# Altium PCB Trap_PCB_V3.3.pcbdoc
Units mm, origin at the board's own origin, x right, y up, seen from the top; angles counter-clockwise.
Board outline 115.04 x 40 mm, 2 copper layers (Top Layer, Bottom Layer); 64 components, 34 nets, 173 pads, 4 vias.
Unrouted connection lines stored in the file: 1.
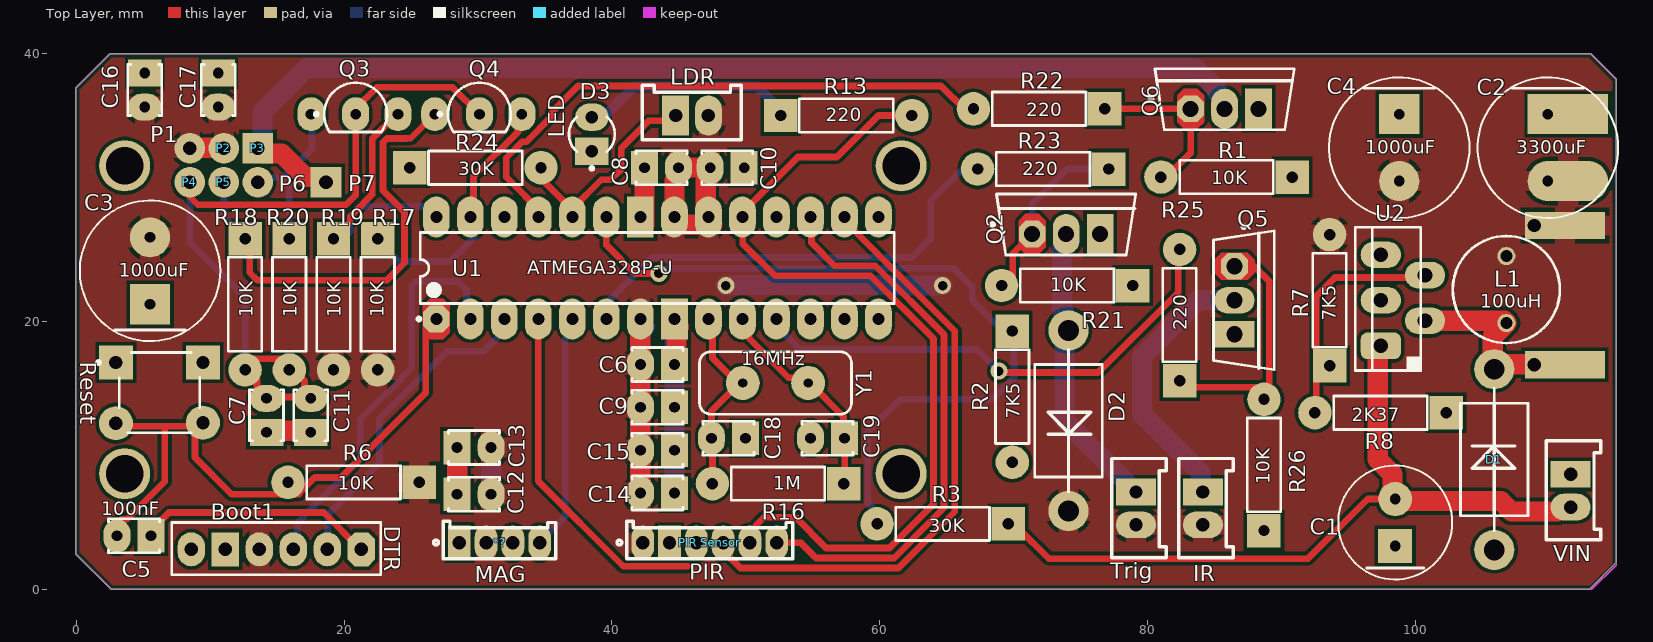
[diagram p0: Top Layer view]
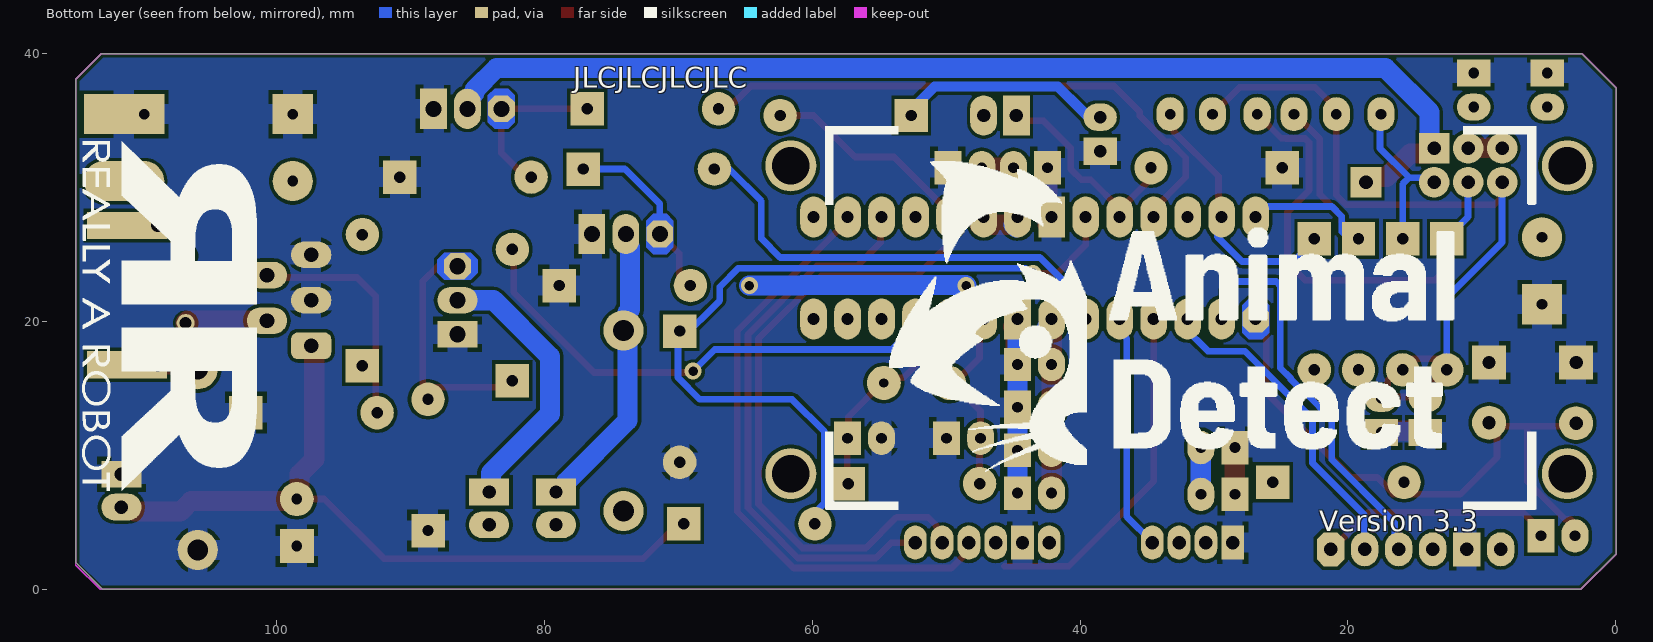
[diagram p1: Bottom Layer view, seen from below]

## Layer stack, top to bottom
Top Solder: solder mask 0.0102, Solder Resist, Dk 3.5
Top Layer: signal copper 0.0356
Dielectric1: dielectric 0.32, FR-4, Dk 4.8
Bottom Layer: signal copper 0.0356
Bottom Solder: solder mask 0.0102, Solder Resist, Dk 3.5

## Board outline
-0.04,2.64 -0.04,37.46 2.5,40 113.1,40 115,38.1 115,2 113,0 2.6,0

## Design rules (kind name [scope] priority, off if disabled: settings)
Clearance [All] p1: gap=0.25 ignorepadtopadclearanceinfootprint=TRUE
DiffPairsRouting [All] p1: maxlimit=2.54 minlimit=0.127 mostfreqgap=0.254 toplayer_minwidth=0.508 toplayer_maxwidth=2.54 toplayer_prefwidth=0.508 bottomlayer_minwidth=0.508 bottomlayer_maxwidth=2.54 bottomlayer_prefwidth=0.508 maxuncoupledlength=12.7
HoleSize [All] p1: absolutevalues=TRUE maxlimit=4 minlimit=0.3 maxpercent=80.000 minpercent=20.000
MinimumSolderMaskSliver [All] p1: minsoldermaskwidth=0.075
PlaneConnect [All] p1: planeconnectstyle=Relief reliefexpansion=0.254 reliefentries=4 reliefconductorwidth=1.524 reliefairgap=0.508
PolygonConnect [All] p1: connectstyle=Relief reliefconductorwidth=1.524 reliefentries=4 polygonreliefangle="90 Angle" airgapwidth=0.3
RoutingVias [All] p1: holewidth=0.711 width=1.27 viastyle="Through Hole" minholewidth=0.711 minwidth=1.27 maxholewidth=0.711 maxwidth=1.27
SilkToSilkClearance [All] p1: silktosilkclearance=0.1
SilkToSolderMaskClearance [IsPad] p1: minsilkscreentomaskgap=0.1 clearancetoexposedcopper=TRUE
SolderMaskExpansion [All] p1: expansion=0.1 istentingtop=FALSE
Width Width_PWR [All] p1: maxlimit=5 minlimit=0.3 preferedwidth=0.5
24 further rules are at their usual default settings.

## Components (designator, comment, footprint, x,y, rotation, side; value= is the part's Value field where it differs from the comment)
*? "MAG Sensor" MAG 34.6,3.5 r270 top
Boot1 "SWR25X-NRTC-S06-ST-BA" FP-SWR25X-NRTC-S06-ST-BA-MFG 14.93,3.3 r180 top
C1 "100uF" FP-EEU-FR1H101B-MFG 98.5,5 r90 top
C2 "1000uF" FP-RAD-TH-D_10_0_5-L_12_5-MFG#1 109.9,33 r270 top
C3 "1000uF" FP-RAD-TH-D_10_0_5-L_12_5-MFG#2 5.5,23.8 r90 top
C4 "1000uF" FP-RAD-TH-D_10_0_5-L_12_5-MFG#2 98.8,33 r270 top
C5 "100nF" KEMT-C315-THT-2#1 4.3,4 r0 top
C6 "100nF" KEMT-C315-THT-2#2 43.4,16.8 r180 top
C7 "100nF" KEMT-C315-THT-2#1 14.2,13 r270 top
C8 "100nF" KEMT-C315-THT-2#2 43.7,31.5 r0 top
C9 "10uF" KEMT-C315-THT-2#2 43.4,13.6 r180 top
C10 "10uF" KEMT-C315-THT-2#2 48.6,31.5 r180 top
C11 "10uF" KEMT-C315-THT-2#1 17.5,13 r270 top
C12 "10uF" KEMT-C315-THT-2#2 29.7,7.1 r0 top
C13 "100nF" KEMT-C315-THT-2#2 29.7,10.6 r0 top
C14 "100nF" KEMT-C315-THT-2#2 43.4,7.2 r180 top
C15 "10uF" KEMT-C315-THT-2#2 43.4,10.4 r180 top
C16 "100nF" KEMT-C315-THT-2#1 5.1,37.3 r90 top
C17 "10uF" KEMT-C315-THT-2#1 10.6,37.3 r90 top
C18 "22pF" KEMT-C315-THT-2#2 48.7,11.3 r180 top
C19 "22pF" KEMT-C315-THT-2#2 56.1,11.3 r180 top
D1 "1N5406" ONSC-AXIAL_LEAD-2-267-05_V 105.9,9.7 r270 top
D2 "1N5406" ONSC-AXIAL_LEAD-2-267-05_V 74.1,12.6 r90 top
D3 "LED" FP-HLMP-1719-MFG 38.5,34 r90 top
IR "JST HXP2" JST_XHP2_THROUGHHOLE 86.137,2.377 r90 top
L1 "100uH" WE-TI-LB 106.8,22.399 r90 top
LDR "JST HXP2" JST_XHP2_THROUGHHOLE 49.65,37.4 r180 top
P1 "0914-0-15-20-77-14-11-0" 0914-0-15-20-77-14-11-0#1 8.475,32.956 r0 top
P2 "0914-0-15-20-77-14-11-0" 0914-0-15-20-77-14-11-0#1 11.015,32.956 r0 top
P3 "0914-0-15-20-77-14-11-0" 0914-0-15-20-77-14-11-0#2 13.555,32.956 r0 top
P4 "0914-0-15-20-77-14-11-0" 0914-0-15-20-77-14-11-0#1 8.475,30.416 r0 top
P5 "0914-0-15-20-77-14-11-0" 0914-0-15-20-77-14-11-0#1 11.015,30.416 r0 top
P6 "0914-0-15-20-77-14-11-0" 0914-0-15-20-77-14-11-0#1 13.555,30.416 r0 top
P7 "0914-0-15-20-77-14-11-0" 0914-0-15-20-77-14-11-0#2 18.644,30.416 r0 top
"PIR Sensor" "JST - PH-6p - 2.0mm" PIR 48.3,3.5 r270 top
Q2 "IRLZ44NPbF" FP-PG-TO220-3-MFG 73.923,27.255 r90 top
Q3 "2N7000" ONSC-TO-92-3-29-11 20.854,35.5 r0 top
Q4 "2N7000" ONSC-TO-92-3-29-11 30.1,35.5 r0 top
Q5 "IRLZ44NPbF" FP-PG-TO220-3-MFG 87.2,21.6 r0 top
Q6 "IRLZ44NPbF" FP-PG-TO220-3-MFG 85.76,36.605 r90 top
R1 "10K" OMTE-RES7X2.5-2 85.9,30.8 r180 top
R2 "7K5" OMTE-RES7X2.5-2 69.9,14.4 r270 top
R3 "30K" OMTE-RES7X2.5-2 64.7,4.9 r180 top
R6 "10K" OMTE-RES7X2.5-2 20.7,8 r180 top
R7 "7K5" OMTE-RES7X2.5-2 93.6,21.6 r90 top
R8 "2K37" OMTE-RES7X2.5-2 97.4,13.2 r180 top
R13 "220" OMTE-RES7X2.5-2 57.5,35.4 r0 top
R16 "1M" OMTE-RES7X2.5-2 52.4,7.9 r180 top
R17 "10K" OMTE-RES7X2.5-2 22.5,21.3 r270 top
R18 "10K" OMTE-RES7X2.5-2 12.6,21.3 r270 top
R19 "10K" OMTE-RES7X2.5-2 19.2,21.3 r270 top
R20 "10K" OMTE-RES7X2.5-2 15.9,21.3 r270 top
R21 "10K" OMTE-RES7X2.5-2 74,22.7 r180 top
R22 "220" OMTE-RES7X2.5-2 71.9,35.9 r180 top
R23 "220" OMTE-RES7X2.5-2 72.209,31.4 r180 top
R24 "30K" OMTE-RES7X2.5-2 29.8,31.5 r0 top
R25 "220" OMTE-RES7X2.5-2 82.4,20.5 r90 top
R26 "10K" OMTE-RES7X2.5-2 88.7,9.3 r90 top
Reset "B3F-1000" OMRON-B3F-1000-4_V 6.2,14.7 r0 top
Trig "JST HXP2" JST_XHP2_THROUGHHOLE 81.137,2.377 r90 top
U1 "ATmega328-PU" 28P3 43.39,24.01 r90 top
U2 "LM2576T-ADJ" KC0005A 98.315,21.694 r180 top
VIN "JST HXP2" JST_XHP2_THROUGHHOLE 113.6,3.7 r90 top
Y1 "16MHz crystal" FOX-FOXSLF160-20 52.213,15.421 r0 top

## Footprints (in the part's own frame and the unit in brackets; to place one, negate y for a bottom-side part, rotate by r counter-clockwise, add the part's x,y. Pads: shape width x height; smd on the part's side, far side on the other; paste and mask are expansions set on the pad)
28P3 [mm] "28-Pin Plastic Dual In-Line Package (PDIP)"
  oct 2x2 hole 0.9: 1(-3.81,16.51)
  oval 3.048x2 hole 0.9: 2(-3.81,13.97) 3(-3.81,11.43) 4(-3.81,8.89) 5(-3.81,6.35) 6(-3.81,3.81) 7(-3.81,1.27) 9(-3.81,-3.81) 10(-3.81,-6.35) 11(-3.81,-8.89) 12(-3.81,-11.43) 13(-3.81,-13.97) 14(-3.81,-16.51) 15(3.81,-16.51) 16(3.81,-13.97) 17(3.81,-11.43) 18(3.81,-8.89) 19(3.81,-6.35) 20(3.81,-3.81) 21(3.81,-1.27) 23(3.81,3.81) 24(3.81,6.35) 25(3.81,8.89) 26(3.81,11.43) 27(3.81,13.97) 28(3.81,16.51)
  rect 3.048x2 hole 0.9: 8(-3.81,-1.27) 22(3.81,1.27)
  Top Layer region: -4.834,15.51 -5.334,16.01 -5.334,17.01 -4.834,17.51 -2.786,17.51 -2.286,17.01 -2.286,16.01 -2.786,15.51
  Bottom Layer region: -4.834,15.51 -5.334,16.01 -5.334,17.01 -4.834,17.51 -2.786,17.51 -2.286,17.01 -2.286,16.01 -2.786,15.51
  silkscreen extent -3.93,-17.7 2.65,17.93, body extent -3.6,-17.65 3.6,17.65, height 4.58
0914-0-15-20-77-14-11-0#1 [mil]
  round 90 hole 40: 1(0,0)
  body extent -39,-39 39,39, height 197
0914-0-15-20-77-14-11-0#2 [mil]
  rect 90x90 hole 40: 1(0,0)
  body extent -39,-39 39,39, height 197
FOX-FOXSLF160-20 [mm] "THD, 2-Leads, Body 11.35x4.65mm"
  round 2.54 hole 0.7: 1(-2.44,0) 2(2.44,0)
  silkscreen extent -5.68,-2.32 5.68,2.32
FP-EEU-FR1H101B-MFG [mm]
  rect 2.54x2.54 hole 0.8 paste-1000 mask+0: 1(-1.75,0)
  round 2.54 hole 0.8 paste-1000 mask+0: 2(1.75,0)
  silkscreen extent -4.25,-4.25 4.25,4.25
FP-HLMP-1719-MFG [mm]
  rect 2.032x2.5 hole 0.95 paste-1000 mask+0: 1(-1.27,0)
  oval 2.032x2.5 hole 0.95 paste-1000 mask+0: 2(1.27,0)
  silkscreen extent -2.67,-1.71 1.3,1.71
FP-PG-TO220-3-MFG [mm]
  oct 2x2 hole 1.2 paste-1000 mask+0: 1(-0.705,2.54)
  oval 3x2 hole 1.2 paste-1000 mask+0: 2(-0.705,0)
  rect 3x2 hole 1.2 paste-1000 mask+0: 3(-0.705,-2.54)
  Top Layer region: -1.705,1.54 -2.205,2.04 -2.205,3.04 -1.705,3.54 0.295,3.54 0.795,3.04 0.795,2.04 0.295,1.54
  Bottom Layer region: -1.705,1.54 -2.205,2.04 -2.205,3.04 -1.705,3.54 0.295,3.54 0.795,3.04 0.795,2.04 0.295,1.54
  silkscreen extent -2.27,-5.2 2.27,5.62, body extent -2.37,-5.55 2.37,5.55, height 0.25
FP-RAD-TH-D_10_0_5-L_12_5-MFG#1 [mm]
  rect 3x6 hole 0.8 copper offset 0,1.5 paste-1000 mask+0: 1(-2.5,0)
  oval 3x6 hole 0.8 copper offset 0,1.5 paste-1000 mask+0: 2(2.5,0)
  silkscreen extent -5.25,-5.25 5.25,5.25, body extent -5.35,-5.35 5.35,5.35, height 0.25
FP-RAD-TH-D_10_0_5-L_12_5-MFG#2 [mm]
  rect 3x3 hole 0.8 paste-1000 mask+0: 1(-2.5,0)
  round 3 hole 0.8 paste-1000 mask+0: 2(2.5,0)
  silkscreen extent -5.25,-5.25 5.25,5.25, body extent -5.35,-5.35 5.35,5.35, height 0.25
FP-SWR25X-NRTC-S06-ST-BA-MFG [mm]
  oct 2.032x2.54 hole 1 paste-1000 mask+0: 1(-6.35,0.3)
  oval 2.032x2.54 hole 1 paste-1000 mask+0: 2(-3.81,0.3) 3(-1.27,0.3) 4(1.27,0.3) 6(6.35,0.3)
  rect 2.032x2.54 hole 1 paste-1000 mask+0: 5(3.81,0.3)
  silkscreen extent -7.8,-1.7 7.8,2.2, body extent -7.9,-3.15 7.9,3.15, height 0.25
JST_XHP2_THROUGHHOLE [mm]
  oval 2x3 hole 1: 1(2.45,2)
  rect 2x3 hole 1: 2(4.9,2)
  silkscreen extent 0,-0.25 7.4,3.81
KC0005A [mm] "FM, 5-Leads, Body 10.16x8.46mm, Pitch 1.7mm"
  rrect50% 3x2 hole 1.1: 1(0.889,3.498)
  oval 3x2 hole 1.1: 2(-2.413,1.622) 3(0.889,0.098) 4(-2.413,-1.778) 5(0.889,-3.302)
  silkscreen extent -2.13,-5.35 2.8,5.35, body extent -2.08,-5.35 2.77,5.35, height 16.51
KEMT-C315-THT-2#1 [mm] "THD, 2-Leads, Body 3.81x2.54mm"
  oval 2x2.5 hole 0.8: 1(-1.27,0)
  rect 2x2.5 hole 0.8: 2(1.27,0)
  silkscreen extent -1.91,-1.27 1.91,1.27, body extent -1.91,-1.27 1.91,1.27, height 4.66
KEMT-C315-THT-2#2 [mm] "THD, 2-Leads, Body 3.81x2.54mm"
  rect 2x2.5 hole 0.8: 1(-1.27,0)
  oval 2x2.5 hole 0.8: 2(1.27,0)
  silkscreen extent -1.91,-1.27 1.91,1.27, body extent -1.91,-1.27 1.91,1.27, height 4.66
MAG [mm]
  rect 2.54x1.7 hole 1: 1(0,-6)
  oval 2.54x1.7 hole 1: 2(0,-4) 4(0,0) 66(0,-2)
  silkscreen extent -1.6,-7.93 1.2,1.2
OMRON-B3F-1000-4_V [mm] "TH, 4-Leads, Body 6x6mm"
  rect 2.54x2.54 hole 1 paste+0: 1(-3.25,2.25) 2(3.25,2.25)
  round 2.54 hole 1 paste+0: 3(-3.25,-2.286) 4(3.25,-2.25)
  silkscreen extent -4.67,-3 3,3, body extent -3,-3 3,3, height 4.5
OMTE-RES7X2.5-2 [mm] "Resistor, Axial; Body 7x2.5mm, Lead Dia. 0.6mm"
  rect 2.5x2.5 hole 0.85: 1(-4.9,0)
  round 2.5 hole 0.85: 2(4.9,0)
  silkscreen extent -3.5,-1.25 3.5,1.25, body extent -3.5,-1.25 3.5,1.25, height 2.5
ONSC-AXIAL_LEAD-2-267-05_V [mm] "AXIAL, 2-Leads, Diameter 5.05mm"
  round 3 hole 1.55: 1(-6.745,0) 2(6.745,0)
  silkscreen extent -5.32,-2.52 5.32,2.52
ONSC-TO-92-3-29-11 [mm] "TO, 3-Leads, Body Dia 4.7mm, Pitch 1.27mm"
  oval 2.032x2.54 hole 0.8: 1(-3.33,0) 2(0,0) 3(3.17,0)
  silkscreen extent -3.07,-1.34 2.35,2.35, body extent -2.35,-1.33 2.36,2.36, height 7.87
PIR [mm]
  oval 2.54x1.7 hole 1: 1(0,-6) 3(0,-2) 4(0,0) 5(0,2) 6(0,4)
  rect 2.54x1.7 hole 1: 2(0,-4)
  silkscreen extent -1.6,-7.93 1.2,5.21
WE-TI-LB [mm] "THT Inductor, 2-Leads, Body 8.0 x 8.0 mm"
  round 1.35 hole 0.9: 1(-2.5,0) 2(2.5,0)
  silkscreen extent -4,-4 4,4, body extent -3.97,-3.96 3.97,3.98, height 12.51

## Part data
Boot1: library part CMP-25680-000010-1, "CONN HEADER VERT 6POS 2.54MM", Current Rating=3A, Manufacturer=Sullins, Temperature="-25°C to +85°C", Temperature Range High=+85°C, Temperature Range Low=-25°C, Voltage Rating=250V, Automotive=No, Category=Conn, ComponentLink2Description=Datasheet, ComponentLink2URL=https://drawings-pdf.s3.amazonaws.com/11633.pdf, Conn Gender=Male, Conn Orientation=Straight, Contact Material=Tin,Nickel, Device Class L1=Connectors, Device Class L2="Headers and Wire Housings", Device Class L3=unset, Digikey Description="CONN HEADER VERT 6POS 2.54MM", Height=11.7mm, Lead Free=Yes, Manufacturer Part Number=SWR25X-NRTC-S06-ST-BA, Number Of Contacts=6, Number Of Rows=1, Octopart=https://octopart.com/swr25x-nrtc-s06-st-ba-sullins-20912730, Package=SWR25X-NRTC-S06-ST-BA, Pitch=2.54mm, RoHS=TRUE
C1: library part CMP-05427-000020-1, "CAP ALUM 100UF 20% 50V RADIAL", Case/Package=Radial, ESR (Equivalent Series Resistance)=61mR, Max Operating Temperature=105°C, Min Operating Temperature=-40°C, Package Quantity=1, Ripple Current=870mA, Tolerance=20%, Voltage Rating=50V, Capacitance=100uF, Contact Plating=Tin, Diameter=8mm, Features="General Purpose", Height=11.5mm, Height - Seated (Max)=0.512inch, Impedance=61mR, Lead Diameter=0.6mm, Lead Free="Lead Free", Lead Pitch=5mm, Length=11.5mm, Life (Hours)=6000Hour, Mount="Through Hole", Packaging="Tape and Reel", Radiation Hardening=No, REACH SVHC="No SVHC", RoHS Compliant=Yes, Series=FR, Termination=Radial, Voltage Rating (DC)=50V
C2 C3 C4: library part CMP-05427-001280-1, "Aluminum Electrolytic Capacitors (Radial Lead Type) AEC-Q200 Qualified 1000uF ±20% 6.3V", Capacitance=1mF, Case/Package=Radial, Dielectric Material=Aluminium, ESR (Equivalent Series Resistance)=90mR, Leakage Current=3uA, Max Operating Temperature=105°C, Min Operating Temperature=-55°C, Package Quantity=200, Ratings=AEC-Q200, Ripple Current=755mA, Tolerance=20%, Voltage=6.3V, Construction=RADIAL, Contact Plating=Tin, Diameter=10mm, Height=12.5mm, Height - Seated (Max)=0.492inch, Impedance=90mR, Lead Diameter=0.6mm, Lead Free="Lead Free", Lead Pitch=5mm, Length=12.5mm, Life (Hours)=3000Hour, Mount="Through Hole", Number of Pins=2, Packaging=Bulk, Polarity=Polar, Radiation Hardening=No, REACH SVHC="No SVHC", Ripple Current (AC)=755mA, RoHS Compliant=Yes, Series=FC, Size=12.5mm, Termination=Radial, Voltage Rating=6.3V, Voltage Rating (DC)=6.3V
C5 C6 C7 C8 C9 C10 C11 C12 C13 C14 C15 C16 C17 C18 C19: library part CMP-1664-00008-1, "Capacitor, Ceramic, 22 pF, +/-10 %, 100 V, -55 to 125 degC, 2-Pin THD, RoHS, Bulk", Case\Package=TO-220, Max Input Voltage="40 V", Max Operating Temperature="125 degC", Max Ouput Current="1.5 A", Min Input Voltage="4.2 V", Min Operating Temperature="0 degC", Output Voltage="1.2 V", Package Quantity=50, ComponentLink1Description="Manufacturer URL", ComponentLink1URL=http://www.kemet.com/, ComponentLink2Description=Datasheet, ComponentLink2URL=http://capacitoredge.kemet.com/capedge2/DataSheet/Datasheet-C315C220K1G5TA.pdf?pn=C315C220K1G5TA{BULK}, DatasheetVersion=Aug-16, Height="9.28 mm", Length="10.28 mm", Mount="Through Hole", Output Current="1.5 A", Outputs=1, PackageDescription="2-Pin Through Hole Device, Body 3.81 x 2.54 mm", PackageReference=C315-THT-2, Packaging=Rail/Tube, Pins=3, Radiation Hardening=No, REACH SVHC="No SVHC", RoHSCompliant=true, Weight="0.08113 oz", Width="4.82 mm"
D1 D2: library part CMP-0902-00090-1, "Standard Recovery Rectifier, 2-Pin Axial_Lead, Pb-Free, Bulk Box", Manufacturer="On Semiconductor", ComponentLink1Description="Manufacturer URL", ComponentLink1URL=http://www.onsemi.com/, ComponentLink2Description=Datasheet, ComponentLink2URL=http://www.onsemi.com/pub_link/Collateral/1N5400-D.PDF, ComponentLink3Description="Package Specification", ComponentLink3URL=http://www.onsemi.com/pub_link/Collateral/267-05.PDF, DatasheetVersion="Rev. 10", IFSM Max (A)=200, IO(rec) Max (A)=3, Mounting Technology="Through Hole", PackageDescription="2-Pin, Axial Lead, Diameter 5.05 mm", PackageReference=AXIAL_LEAD-2-267-05, PackageVersion="Rev. G, 06/2000", Packing="Bulk Box", PartNumber=1N5406, RoHS=TRUE, Type="Standard Recovery", VRRM Max (V)=600
D3: library part CMP-2000-06410-2, "LED YELLOW DIFFUSED T-1 T/H", Colour=Yellow, Forward Current=2mA, Forward Voltage=1.8V, Manufacturer=Broadcom, Manufacturer Part Number=HLMP-1719, Package=0, Power Dissipation=17.5mW, Reverse Voltage=5V, Temperature="-40°C to +100°C", Temperature Range High=+100°C, Temperature Range Low=-40°C, Automotive=No, Category=Diode, ComponentLink2Description=Datasheet, ComponentLink2URL=https://docs.broadcom.com/docs/AV02-1557EN, Device Class L1=Optoelectronics, Device Class L2=LEDs, Device Class L3=unset, Digikey Description="LED YELLOW DIFFUSED T-1 T/H", Lead Free=Yes, Led Orientation=Straight, Luminous Intensity=2.1mcd, Mouser Description="Standard LEDs - Through Hole Yellow Diffused 585nm 2.1mcd", Octopart=https://octopart.com/hlmp-1719-broadcom-71130405, RoHS=TRUE, Viewing Angle=50°, Wavelength=585nm
L1: library part CMP-0225-00065-1, "Radial Leaded Wire Wound Inductor WE-TI, L = 100 µH", Inductance="100 ÂµH", ComponentLink1Description="Manufacturer Link", ComponentLink1URL=http://www.we-online.com, ComponentLink2Description=Datasheet, ComponentLink2URL=http://www.we-online.de/katalog/media/pdf/744743101.pdf, DatasheetVersion="ver 3, Nov-2004", PackageDescription="THT Inductor, 2-Leads, Body 8.0 x 8.0 mm", PackageReference=WE-TI-LB, PackageVersion=2004
P1 P2 P3 P4 P5 P6 P7: "CONTACT SPRING LOADED T/H GOLD"
Q2 Q5 Q6: library part CMP-32901-000488-1, "MOSFET N-CH 55V 47A TO220AB", Case/Package=TO-220, Continuous Drain Current (ID)=47A, Drain to Source Breakdown Voltage=55V, Drain to Source Resistance=35mR, Gate to Source Voltage (Vgs)=16V, Input Capacitance=1.7nF, Max Operating Temperature=175°C, Max Power Dissipation=110W, Min Operating Temperature=-55°C, Threshold Voltage=2V, Drain to Source Voltage (Vdss)=55V, Element Configuration=Single, Halogen Free="Halogen Free", Height=0.6inch, Lead Free="Lead Free", Length=0.414inch, Max Dual Supply Voltage=55V, Mount="Through Hole", Number of Pins=3, Packaging=Rail/Tube, Power Dissipation=110W, Rds On Max=22mR, REACH SVHC="No SVHC", RoHS Compliant=Yes, Turn-Off Delay Time=26ns, Turn-On Delay Time=11ns, Width=0.185inch
Q3 Q4: library part CMP-1058-00936-1, "Small Signal MOSFET, 200 mA, 60 V, N-Channel, 3-Pin TO-92, Bulk Box", Manufacturer="On Semiconductor", Package Type=TO-92, Channel Polarity="N Channel", Ciss Typ (pF)=60, ComponentLink1Description="Manufacturer URL", ComponentLink1URL=http://www.onsemi.com/, ComponentLink2Description=Datasheet, ComponentLink2URL=http://www.onsemi.com/pub_link/Collateral/2N7000-D.PDF, ComponentLink3Description="Package Specification", ComponentLink3URL=http://www.onsemi.cn/pub_link/Collateral/2N6426-D.PDF, Configuration=Single, Coss Typ (pF)=25, Crss Typ (pF)=5, DatasheetVersion="Rev. 8", ID Max (A)=0.2, Mounting Technology="Through Hole", PackageDescription="3-Pin Transistor Outline, Body 4.825 x 3.685 mm, Pitch 1.27 mm", PackageReference=TO-92-3-29-11_AM_SL, PackageVersion="Rev. AM", Packing="Bulk Box", PartNumber=2N7000, PD Max (W)=0.35, V(BR)DSS Min (V)=60, VGS Max (V)=20, VGS(th) Max (V)=3
R1 R2 R3 R6 R7 R8 R13 R16 R17 R18 R19 R20 R21 R22 R23 R24 R25 R26: library part CMP-2000-06865-1, "Little Demon(R) Carbon Composition Molded OD Series, 250 V, 10 KOhm, +/-5%, -70 to 130 degC, 2-Pin THD, RoHS, Bulk", Manufacturer=Ohmite, Operating Temperature=-, Package / Case=Axial, Package Description="2-Pin THD Resistor, Body 7 x 2.5 mm, Lead Dia. 0.6 mm", Package Reference=RES7X2.5, PartNumber=OD103JE, Power (Watts)=0.25W,1/4W, Power Rating=0.25W, Resistance (Ohms)=10k, Standard Package=100, Tolerance=±5%, Catalog Drawings=OD,OF,OASeries, Category=Resistors, Composition=CarbonComposition, Datasheet URL=http://www.ohmite.com/cat/res_od_of_oa.pdf, Datasheet Version=06/2016, EDA / CAD Models=DownloadfromAcceleratedDesigns, Family=ThroughHoleResistors, Features=PulseWithstanding, Height=-, Manufacturer URL=http://www.ohmite.com/, Mounting Technology=ThroughHole, Number of Terminations=2, Online Catalog=OD,OF,OASeries,LittleDemon®, Packaging=Bulk, RoHS Information="LittleDemon\"E\"SeriesMaterialDeclaration", Series=LittleDemon®OD, Size / Dimension="0.098\"Diax0.276\"L(2.50mmx7.00mm)", Supplier Device Package=Axial, Temperature Coefficient=-
Reset: library part CMP-1677-00002-1, "Tactile Switch, SPST-NO, 0.05 A, 5 to 24 V, -25 to 70 degC, 4-Pin THD, RoHS, Bulk", Capacitance="-45 f", Current Rating="1.5 A", Max Operating Temperature="70 degC", Min Operating Temperature="-40 degC", Package Quantity=1080, Voltage Rating="150 V", ComponentLink1Description="Manufacturer URL", ComponentLink1URL=http://www.omron.com/, ComponentLink2Description=Datasheet, ComponentLink2URL=http://www.omron.com/ecb/products/pdf/en-b3f.pdf, Contact Material=Brass, Contact Plating=Gold, DatasheetVersion=Jan-15, Gender=Female, Height="14.99 mm", Lead Pitch="1.27 mm", Length="18.34 mm", Mount="Through Hole", PackageDescription="4-Pin Through Hole Device, Body 6 x 6 mm", PackageReference=B3F-1000, Packaging=Tray, Pins=8, Radiation Hardening=No, RoHSCompliant=true, Shielding=Shielded, Width="25.4 mm"
U1: library part CMP-0095-00015-2, "8-bit AVR Microcontroller, 32KB Flash, 1KB EEPROM, 2KB SRAM, 28-pin PDIP, Industrial Grade (-40°C to 85°C)", ComponentLink1Description="Manufacturer URL", ComponentLink1URL=http://www.atmel.com/, ComponentLink2Description="ATmega48A/48PA/88A/88PA/168A/168PA/328/328P Datasheet", ComponentLink2URL=http://www.atmel.com/dyn/resources/prod_documents/8271.pdf, ComponentLink3Description="ATmega48A/48PA/88A/88PA/168A/168PA/328/328P Summary", ComponentLink3URL=http://www.atmel.com/dyn/resources/prod_documents/8271S.pdf, DatasheetVersion="revD, May-2011", PackageDescription="28-lead (0.300\"/7.62mm Wide) Plastic Dual Inline Package (PDIP)", PackageReference=28P3, PackageVersion="revB, Sep-2001", RevisionNote="DatasheetVersion updated. URLs added."
U2: library part CMP-0069-02003-3, "SIMPLE SWITCHER® 3A Step-Down Voltage Regulator, 5-pin TO-220", Manufacturer="Texas Instruments", PackageTopMarking="NSUZXYTTE#*LM2576T*-ADJ P+", PowerWise=N, Code_JEDEC=TO-220-AB, ComponentLink1Description="Datasheet URL", ComponentLink1URL=http://www.ti.com/general/docs/lit/getliterature.tsp?genericPartNumber=LM2576&fileType=pdf, CompType=Switcher, PackageDescription="TO-220, Molded, 5 Lead, Straight", PackageReference=KC0005A, PinCount=5, RoHS=N
Y1: library part CMP-1749-00003-1, "Resistance Weld Thru-Hole Crystal, 16 MHz, -20 to 70 degC, 2-Pin THD, RoHS, Bulk", Case\Package=Axial, Max Operating Temperature="155 degC", Min Operating Temperature="-55 degC", Package Quantity=200, Power Rating="250 mW", Resistance="221 kohm", Tolerance=1%, Voltage Rating="250 V", ComponentLink1Description="Manufacturer URL", ComponentLink1URL=http://www.foxonline.com/, ComponentLink2Description=Datasheet, ComponentLink2URL=http://www.foxonline.com/pdfs/hc49slf.pdf, DatasheetVersion=Mar-15, Length="0.248 inch", Mount="Through Hole", PackageDescription="2-Pin Through Hole Device, Body 11.35 x 4.65 mm", PackageReference=FOXSLF160-20, Packaging=Bulk, RoHSCompliant=true

## Free pads (board coordinates)
  round 3.81 hole 2.8: 1(3.605,8.645) 2(3.605,31.645) 3(61.605,31.645) 4(61.605,8.645)
  rect 6x2.032 hole 1 copper offset 2.278,0: 35(108.9,27.182) 36(108.9,16.782)

## Via types
v1: diameter 1.27, hole 0.711, Top Layer to Bottom Layer, 4 vias

## Nets (pads, with @x,y where several pads share a name; then routed paths per layer and width w, separated by ;. In a path a pad name is that pad's centre, name@x,y a point inside that pad or via, vN(x,y) a via of type N, cw(c..) or ccw(c..) an arc to the next point about the centre after c; other vN are vias at no path point)
5.1V: "PIR Sensor.1" *?.2 Boot1.4 C2.2 C3.2 C4.2 C6.2 C8.2 C9.2 C10.2 C12.2 C13.2 C14.2 C15.2 C16.1 C17.1 D2.1 IR.1 L1.2 LDR.1 P1.1 P2.1 pad.35 R6.1 R7.2 R17.2 R19.2 Trig.1 U1.7 U1.20 U1.21 | length 48.6
  Top Layer w1.5: U1.21 44.66,30.555 44.97,30.865 C8.2 C10.2 47.33,30.865 47.004,30.538 47.004,28.676 47.2,28.479 U1.20 ; U1.21@44.972,27.243 44.973,27.241 47.513,27.241 U1.20@47.422,27.333
  Top Layer w1.524: P1.1 8.497,32.978 10.978,32.978 P2.1@11,33 ; U1.7 42.125,20.195 42.125,7.205 C14.2
  Bottom Layer w1.5: U1.21@44.782,27.05 U1.21@44.973,27.241
  Bottom Layer w1.524: C12.2 C13.2 ; U1.7@42.255,19.409 U1.7@42.45,19.604 ; v1(48.5,22.7) 48.536,22.736 60.733,22.736 60.769,22.7 v1(64.7,22.7)
A0-BATT: R2.1 R3.2 U1.23 | length 59.9
  Top Layer w0.5: U1.23 39.58,25.72 41.7,23.6 v1(43.5,23.6)
  Bottom Layer w0.5: v1(43.5,23.6) 43.708,23.6 44.108,24 65.507,24 66.9,22.607 66.9,21.591 69.9,18.591 70.035,18.456 70.035,15.83 68.405,14.2 61.5,14.2 59.1,11.8 59.1,6.446 59.459,6.087 R3.2@59.459,5.524 ; R3.2@59.459,4.824 R3.2@60.073,4.21 ; R3.2@60.073,5.21 60.636,5.21 R3.2@60.636,4.9
A1-LDR: LDR.2 R24.2 U1.24 | length 16.6
  Top Layer w0.5: R24.2 34.7,30.684 37.04,28.344 U1.24 37.04,28.44 39.2,30.6 39.9,30.6 40.7,31.4 40.7,32.977 42.723,35 LDR.2@44.75,35
A2-GATE: R22.2 U1.25 | length 42.6
  Top Layer w0.5: U1.25@34.813,28.087 32.1,30.8 32.1,32.239 33.289,33.429 33.597,33.429 35.529,35.361 35.529,35.668 37.461,37.6 64.578,37.6 65.548,36.63 65.593,36.63 66.278,35.945 R22.2@66.278,35.9
A4-SDA: Q4.3 R17.1 U1.27 | length 18.5
  Top Layer w0.5: U1.27@29.66,27.8 29.66,30.86 32.977,34.177 32.977,35.207 Q4.3
  Bottom Layer w0.5: R17.1@22.5,25.491 23.052,25.491 24.043,24.5 27.9,24.5 29.733,26.333 U1.27@29.733,27.241
A5-SCL: Q3.3 R19.1 U1.28 | length 21.3
  Top Layer w0.5: R19.1 20.45,27.45 20.45,27.85 20.5,27.9 20.5,27.907 20.793,28.2 20.8,28.2 22.087,29.487 22.087,33.639 23.902,35.454 Q3.3@24,35.454
  Bottom Layer w0.5: R19.1@19.2,25.491 20.45,26.741 20.45,27.857 21.193,28.6 26.187,28.6 26.88,27.907 U1.28
Crystal1: C18.2 R16.2 U1.9 Y1.1 | length 13.8
  Top Layer w0.5: U1.9@47.513,19.621 47.513,17.287 49.379,15.421 Y1.1@49.521,15.421 ; R16.2@47.6,7.9 47.515,7.985 47.515,11.215 C18.2 47.43,13.33 Y1.1@49.521,15.421 ; Y1.1 Y1.1@49.521,15.421
Crystal2: C19.1 R16.1 U1.10 Y1.2 | length 15.5
  Top Layer w0.5: U1.10@50.053,19.621 50.027,19.596 50.027,18.983 50.315,18.695 50.315,18.685 53.188,15.812 54.263,15.812 Y1.2 54.779,15.421 57.3,12.9 57.3,11.37 C19.1 57.385,11.285 57.385,7.915 R16.1@57.4,7.9
CS: "PIR Sensor.4" U1.16 | length 45.6
  Top Layer w0.5: 48.3,3.5 48.53,3.27 48.53,2.671 49.6,1.6 61.396,1.6 65.6,5.804 65.6,19.3 57.36,27.54 U1.16
D2-PIR: "PIR Sensor.3" U1.4 | length 25.9
  Top Layer w0.5: U1.4 34.5,8.073 40.843,1.73 45.649,1.73
D3-MAG: *?.4 U1.5 | length 18.1
  Bottom Layer w0.5: *?.4@34.6,3.1 34.6,3.52 36.5,5.42 36.5,18.73 37.04,19.27 U1.5
D4-Trig: R23.2 U1.6 | length 36
  Bottom Layer w0.5: U1.6@39.893,19.621 39.893,21.693 43,24.8 62.4,24.8 63.8,26.2 63.8,29 66.188,31.388 68.133,31.388 R23.2@68.145,31.4
D5-IR: R25.2 U1.11 | length 38.4
  Top Layer w0.5: U1.11@52.28,19.27 U1.11 ; v1(68.9,16.3) 69,16.2 76.31,16.2 82.3,22.19 82.3,24.9 R25.2@82.5,25.1
  Bottom Layer w0.5: U1.11 52.28,19.676 54.038,17.918 67.282,17.918 v1(68.9,16.3)
D13-LED: "PIR Sensor.5" R13.2 U1.19 | length 64.8
  Top Layer w0.5: 50.3,3.5 50.3,4.245 50.728,4.673 50.728,4.754 51.374,5.4 53.7,5.4 56,3.1 60.739,3.1 64.01,6.37 64.01,18.736 59.318,23.427 52.173,23.427 49.759,25.841 49.759,27.801 U1.19 49.74,28.14 53.9,32.3 56.8,32.3 59.9,35.4 R13.2
DTR: Boot1.1 C5.2 | length 18.8
  Top Layer w0.5: C5.2@5.17,4 5.17,4.007 6.904,5.741 18.472,5.741 21.142,3.071 21.25,2.963 21.25,2.929 Boot1.1@21.25,2.5 ; Boot1.1@21,2.5 Boot1.1@21,2.929
FB: R7.1 R8.2 U2.4 | length 17.6
  Top Layer w0.5: R8.2@92.836,13.2 92.615,13.421 92.615,17.503 92.615,21.915 93.994,23.294 U2.4@100.55,23.294 ; U2.4@99.835,23.6 U2.4@100.013,23.778
GND: "PIR Sensor.2" *?.1 Boot1.5 C1.1 C2.1 C3.1 C4.1 C6.1 C7.2 C8.1 C9.1 C10.1 C11.2 C12.1 C13.1 C14.1 C15.1 C16.2 C17.2 C18.1 C19.2 D1.2 D3.1 Q2.3 Q5.3 Q6.3 R1.1 R2.2 R8.1 R21.1 R24.1 R26.1 Reset.1 Reset.2 U1.8 U1.22 U2.3 U2.5 VIN.2 | length 28
  Top Layer w0.3: C14.1@44.67,6.8 C14.1 C14.1@44.67,7.3
  Top Layer w1: C8.1 C8.1@42.432,31.499 ; U1.22@42.432,27.243 U1.22@42.433,27.241
  Top Layer w1.524: C7.2@14.2,11.86 14.215,11.845 17.785,11.845 C11.2@17.8,11.83 ; C12.1 C13.1 ; U1.22@42.432,27.243 C8.1@42.432,31.499 ; C6.1@44.67,16.6 44.822,16.751 44.822,19.47 U1.8@44.973,19.621
  Bottom Layer w1.5: U1.8 44.67,20.19 C6.1 C9.1 C15.1 C14.1
MISO: U1.18
MOSI: "PIR Sensor.6" U1.17 | length 42.2
  Top Layer w0.5: 52.3,3.479 54.121,3.479 55.25,2.35 61.086,2.35 62.3,3.564 62.3,3.6 64.8,6.1 64.8,19.039 59.662,24.177 56.623,24.177 54.899,25.901 54.899,27.741 U1.17
NetD1_1: D1.1 L1.1 pad.36 U2.2 | length 16.5
  Top Layer w1: pad.36@110.2,16.9 pad.36@111.718,16.818
  Top Layer w1.524: D1.1 105.776,16.569 105.776,18.875 L1.1 ; D1.1@106.818,16.818 110.2,16.818 pad.36@111.718,16.818
  Top Layer w1.54: U2.2 106.627,20.072 L1.1
NetD2_2: D2.2 Q2.2 Trig.2 | length 21.7
  Bottom Layer w1.5: D2.2@73.61,19.835 73.813,20.038 73.813,20.693 73.6,20.906 73.6,25.591 73.923,25.915 Q2.2 ; D2.2 73.813,19.058 73.813,17.997 73.8,17.984 73.8,12.614 78.387,8.027 78.387,7.527 78.637,7.277 Trig.2
NetD3_2: D3.2 R13.1 | length 16.7
  Bottom Layer w0.762: D3.2 39.352,35.27 39.935,35.854 39.954,35.854 41.669,37.569 50.864,37.569 53.033,35.4 R13.1@53.309,35.4
NetIR_2: IR.2 Q5.2 | length 20.6
  Bottom Layer w1.5: IR.2 83.996,7.418 83.996,8.704 79.6,13.1 79.6,17.4 83.8,21.6 Q5.2
NetQ2_1: Q2.1 R21.2 R23.1 | length 12.8
  Top Layer w0.5: R21.2@69.936,22.7 69.936,25.103 Q2.1
  Bottom Layer w0.5: Q2.1 71.383,28.783 74,31.4 R23.1@76.4,31.4
NetQ5_1: Q5.1 R25.1 R26.2 | length 19.3
  Top Layer w0.5: R25.1@82.3,15.1 R26.2@89.1,15.1 ; Q5.1 87.96,24.14 89.1,23 R26.2@89.1,15.1 ; R26.2 R26.2@89.1,14.6 ; R26.2@89.1,14.6 R26.2@89.1,15.1 ; R26.2@89.1,14.6 R26.2@89.1,15.1
NetQ6_1: Q6.1 R1.2 R22.1 | length 12.8
  Top Layer w0.5: R22.1@76.091,35.895 Q6.1@83.21,35.895 ; R1.2@81.836,30.8 81.836,31.214 83.22,32.598 Q6.1
POGO-3V: C7.1 C11.1 P4.1 Q3.2 Q4.2 R18.2 R20.2 | length 61.9
  Top Layer w0.5: P4.1 8.475,29.525 8.5,29.5 8.5,29.293 9.061,28.732 20.139,28.732 20.854,29.447 Q3.2@20.854,34.822 ; C7.1@14.2,14.4 14.185,14.4 13.492,15.093 13.492,15.667 12.6,16.56 12.6,17.236 14.829,17.236 ; C7.1@14.23,14.37 C11.1@17.4,14.37 ; R20.2@15.9,16.165 14.829,17.236 ; C11.1@17.8,14.37 17.72,14.37 17.56,14.53 17.028,15.063 17.028,15.572 15.9,16.7 15.9,17.236 14.829,17.236 ; Q3.2 20.854,35.92 22.434,37.5 28.1,37.5 Q4.2
  Bottom Layer w0.5: P4.1 8.475,25.925 12.6,21.8 R18.2 ; R20.2@15.9,15.93 R20.2
POGO-GND: P3.1 P7.1 Q6.2 | length 84
  Top Layer w1.5: P3.1 13.948,32.563 15.337,32.563 17.091,30.809 18.251,30.809 18.251,30.768 P7.1@18.644,30.375
  Bottom Layer w1.5: P3.1 13.888,33.289 13.888,35.644 17.194,38.95 83.584,38.95 85.22,37.314 85.22,37.075 85.754,36.541 Q6.2@85.754,35.899
POGO-SCL: P6.1 Q3.1 R20.1 | length 13.1
  Bottom Layer w0.5: P6.1 13.897,30.758 15.412,30.758 ; R20.1@15.9,25.491 15.9,30.269 15.412,30.758 ; Q3.1@17.6,35.454 17.6,32.946 15.412,30.758
POGO-SDA: P5.1 Q4.1 R18.1 | length 33.6
  Top Layer w0.5: R18.1@12.6,25.491 12.945,25.146 12.945,23.655 13.5,23.1 23.2,23.1 24.5,24.4 24.5,28.193 23.193,29.5 22.9,29.793 22.9,33.391 23.193,33.684 24.628,33.684 24.644,33.7 24.97,33.7 Q4.1
  Bottom Layer w0.5: P5.1 11.015,27.831 12.6,26.246 R18.1
Reset: C5.1 R6.2 Reset.3 Reset.4 U1.1 | length 46.6
  Top Layer w0.5: C5.1@2.63,4 2.63,4.5 3.38,5.25 3.799,5.25 6.6,8.051 6.6,12.2 ; Reset.3 3.164,12.2 6.6,12.2 ; Reset.4 9.1,12.45 Reset.4@8.85,12.2 ; U1.1 26.1,19.42 26.1,14.7 19.759,8.359 17.791,8.359 16.636,7.204 16.636,7.1 15.736,7.1 11.6,7.1 8.85,9.85 Reset.4@8.85,12.2 ; 6.6,12.2 Reset.4@8.85,12.2
RX: Boot1.3 U1.2 | length 30.2
  Bottom Layer w0.5: Boot1.3 16.493,3.293 16.493,4.974 16.678,5.159 16.678,5.178 16.76,5.26 21.2,9.7 21.2,12.705 23.145,14.65 23.225,14.65 24.25,15.675 24.25,15.755 25.05,16.555 25.05,22.707 25.343,23 28.5,23 29.133,22.367 29.133,20.487 U1.2
TX: Boot1.2 U1.3 | length 23.3
  Bottom Layer w0.5: Boot1.2@18.58,3.6 18.766,3.786 18.766,5.566 22.64,9.44 22.64,12.74 27.7,17.8 30.451,17.8 U1.3@32.273,19.621
VIN: C1.2 R3.1 U2.1 VIN.1 | length 57.8
  Top Layer w0.5: R3.1@69.598,5.6 70.329,4.6 70.329,4.595 72.624,2.3 92,2.3 96.45,6.75 C1.2
  Top Layer w1.5: U2.1 97.2,17.97 97.2,9.709 98.301,8.608 C1.2@98.301,6.799 ; C1.2 98.65,6.6 106.4,6.6 107.176,5.824 110.638,5.824 110.965,6.15 VIN.1
pads on no net: *?.66 Boot1.6 U1.12 U1.13 U1.14 U1.15 U1.26

## Polygon pours and split planes (outlines as drawn)
GND on Bottom Layer "GND" (solid, pour order 0): 2.6,0 0,2.6 0,37.5 2.5,40 113.1,40 115,38.1 115,2 113,0
5.1V on Top Layer "GND" (solid, pour order 1): 2.6,0 0,2.6 0,37.5 2.5,40 113.1,40 115,38.1 115,2 113,0

## Keep-outs
Keep-Out Layer:
  lines w0.1: -0.04,2.64 -0.04,37.46 2.5,40 113.1,40 115,38.1 115,1.8 113.2,0 2.6,0 -0.04,2.64

## Silkscreen, mask and mechanical layers (free items; w line width, h text height)
Top Overlay:
  lines w0.254: 69.05,28.45 79.05,28.45 ; 80.7,38 90.8,38 ; 88.3,16.5 88.3,26.6
  text "220" at 70.954,35.354 h1
  text "220" at 55.954,34.954 h1
  text "LED" at 36.422,33.746 h1.2 r90
  text "1000uF" at 96.254,32.554 h1
  text "3300uF" at 107.554,32.554 h1
  text "30K" at 28.512,30.947 h1
  text "220" at 70.654,30.954 h1
  text "10K" at 84.754,30.254 h1
  text "ATMEGA328P-U" at 33.654,23.554 h1
  text "1000uF" at 3.154,23.354 h1
  text "10K" at 72.754,22.254 h1
  text "100uH" at 104.854,21.054 h1
  text "10K" at 13.153,20.312 h1 r90
  text "10K" at 16.453,20.312 h1 r90
  text "10K" at 19.753,20.312 h1 r90
  text "10K" at 22.953,20.312 h1 r90
  text "7K5" at 94.046,20.054 h1 r90
  text "220" at 82.946,19.354 h1 r90
  text "16MHz" at 49.654,16.754 h1
  text "7K5" at 70.446,12.754 h1 r90
  text "2K37" at 95.254,12.554 h1
  text "10K" at 89.146,7.854 h1 r90
  text "10K" at 19.512,7.447 h1
  text "1M" at 52.054,7.454 h1
  text "100nF" at 1.854,5.554 h1
  text "30K" at 63.654,4.254 h1
Bottom Overlay:
  drawing of 34 lines, arcs and shapes, not listed
  text "JLCJLCJLCJLC" at 77.846,37.454 h1.52
  text "Version 3.3" at 22.146,4.354 h1.52
Outline:
  the board outline again, w0.1
Document:
  lines w0.003: 33.774,19.275 33.774,19.276

## Text inside footprints (layer, text, board x,y; h text height)
*?: Top Overlay "MAG" at 29.754,0.554 h1.2
Boot1: Top Overlay "DTR" at 22.984,4.746 h1.2 r270
"PIR Sensor": Top Overlay "PIR" at 45.76,0.706 h1.2